# Altium PCB AC_REMOTE.PcbDoc
Units mil, origin at the board's own origin, x right, y up, seen from the top; angles counter-clockwise.
Board outline 1780 x 4730 mil, 2 copper layers (Top Layer, Bottom Layer); 44 components, 38 nets, 149 pads, 107 vias.
Unrouted connection lines stored in the file: 1.
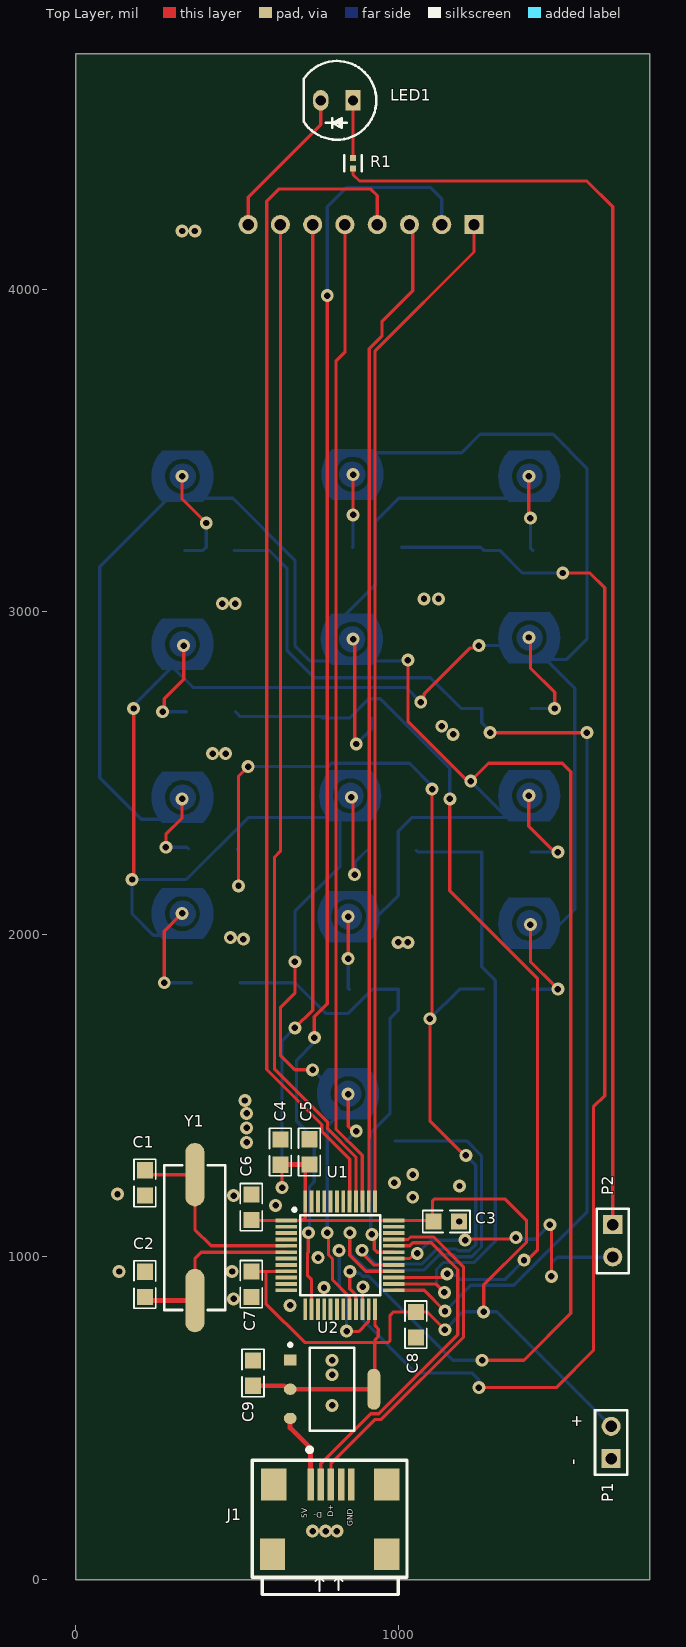
[diagram p0: Top Layer view]
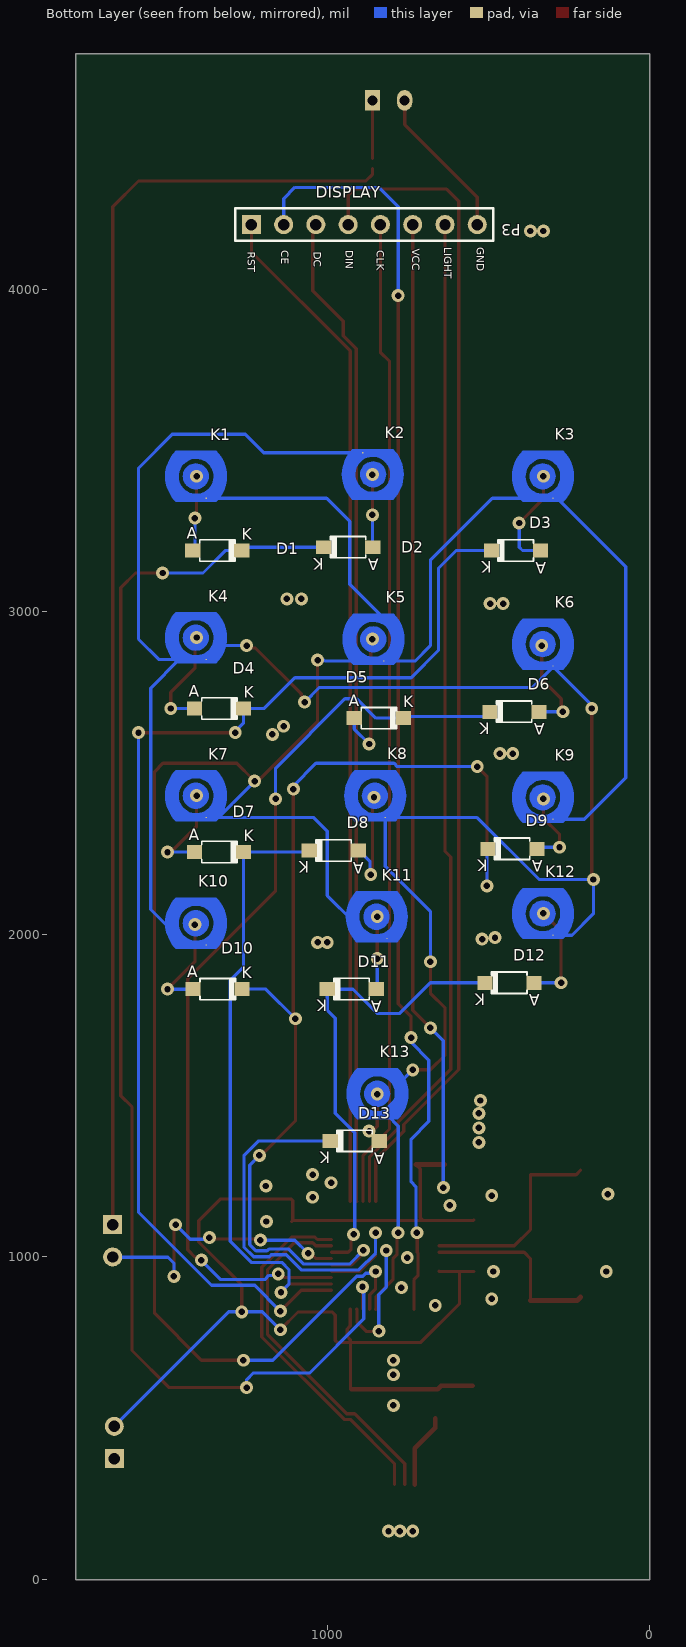
[diagram p1: Bottom Layer view, seen from below]
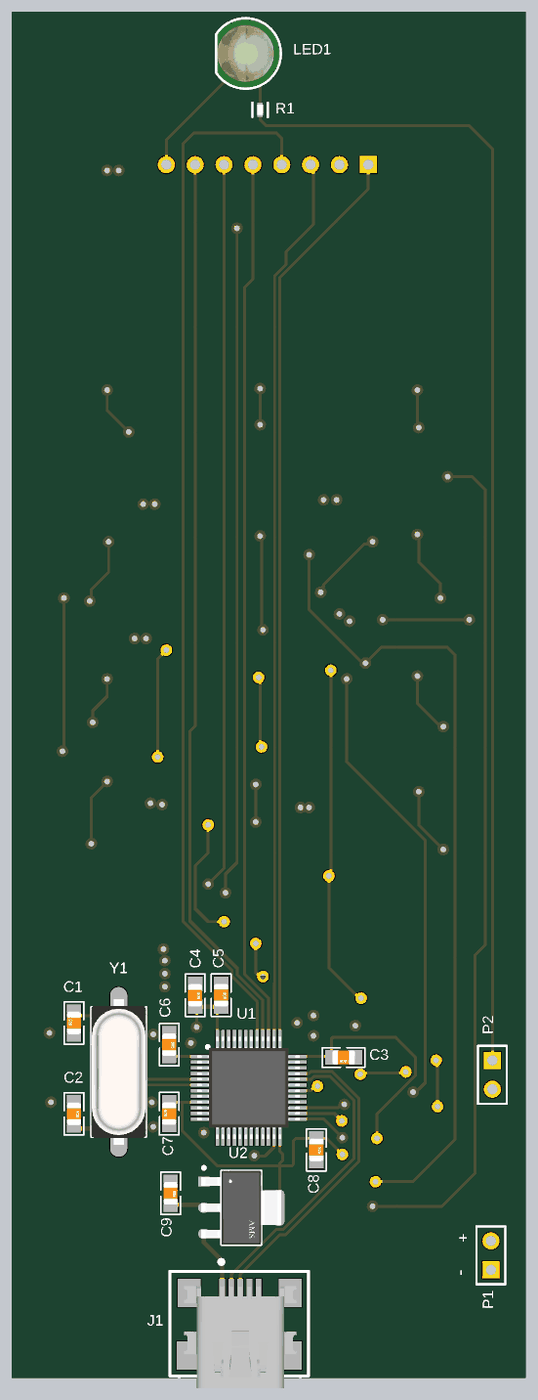
[diagram p2: 3D render of the assembled board from above, using the file's embedded part models]

## Layer stack, top to bottom
Top Solder: solder mask 0.4, Solder Resist, Dk 3.5
Top Layer: signal copper 1.4
Dielectric 1: dielectric 12.6, FR-4, Dk 4.8
Bottom Layer: signal copper 1.4
Bottom Solder: solder mask 0.4, Solder Resist, Dk 3.5

## Board outline
0,0 0,4730 1780,4730 1780,0

## Design rules (kind name [scope] priority, off if disabled: settings)
Clearance [All] p1: gap=8 ignorepadtopadclearanceinfootprint=TRUE
PolygonConnect [All] p1: connectstyle=Relief reliefconductorwidth=10 reliefentries=4 polygonreliefangle="90 Angle" airgapwidth=10
RoutingVias [All] p1: holewidth=20 width=30 viastyle="Through Hole" minholewidth=20 minwidth=30 maxholewidth=20 maxwidth=50
SolderMaskExpansion [All] p1: expansion=4 istentingtop=FALSE
Width [All] p1: maxlimit=50 minlimit=10 preferedwidth=10
30 further rules are at their usual default settings.

## Classes and differential pairs
component class AC_REMOTE: C1 C2 C3 C4 C5 C6 C7 C8 C9 J1 LED1 P1 P2 R1 U1 U2 Y1
component class key_pad: D1 D2 D3 D4 D5 D6 D7 D8 D9 D10 D11 D12 D13 K1 K2 K3 K4 K5 K6 K7 K8 K9 K10 K11 K12 K13

## Components (designator, comment, footprint, x,y, rotation, side; value= is the part's Value field where it differs from the comment)
C1 "20pF" CAP_0805 215,1229.37 r90 top
C2 "20pF" CAP_0805 215,915 r270 top
C3 "100nF" CAP_0805 1149.37,1110 r180 top
C4 "100nF" CAP_0805 635,1325 r270 top
C5 "100nF" CAP_0805 725,1325.63 r270 top
C6 "100nF" CAP_0805 545,1154.37 r270 top
C7 "100nF" CAP_0805 545,915.63 r90 top
C8 "4.7uF" CAP_0805 1055,790 r270 top
C9 "47uF" CAP_0805 550,640 r270 top
D1 "1N4148W-7-F" DIO_SOD-123 1340.72,3189.78 r180 bottom
D2 "1N4148W-7-F" DIO_SOD-123 935,3200 r0 bottom
D3 "1N4148W-7-F" DIO_SOD-123 415,3190 r0 bottom
D4 "1N4148W-7-F" DIO_SOD-123 1335,2700 r180 bottom
D5 "1N4148W-7-F" DIO_SOD-123 840,2670 r180 bottom
D6 "1N4148W-7-F" DIO_SOD-123 420,2690 r0 bottom
D7 "1N4148W-7-F" DIO_SOD-123 1335,2255 r180 bottom
D8 "1N4148W-7-F" DIO_SOD-123 980,2260 r0 bottom
D9 "1N4148W-7-F" DIO_SOD-123 426.28,2265.22 r0 bottom
D10 "1N4148W-7-F" DIO_SOD-123 1340,1830 r180 bottom
D11 "1N4148W-7-F" DIO_SOD-123 924.28,1830.22 r0 bottom
D12 "1N4148W-7-F" DIO_SOD-123 435,1850 r0 bottom
D13 "1N4148W-7-F" DIO_SOD-123 915,1360 r0 bottom
J1 "USB2.0 MINI B" CON_690-005-299-043 964.72,295 r90 top
K1 "KEY PAD" KEYPAD 1392,3383.5 r180 bottom
K2 "KEY PAD" KEYPAD 873,3461.5 r0 bottom
K3 "KEY PAD" KEYPAD 317,3383.5 r180 bottom
K4 "KEY PAD" KEYPAD 1392,2883.5 r180 bottom
K5 "KEY PAD" KEYPAD 842,2878.5 r180 bottom
K6 "KEY PAD" KEYPAD 317,2863.5 r180 bottom
K7 "KEY PAD" KEYPAD 1392,2393.5 r180 bottom
K8 "KEY PAD" KEYPAD 837,2393.5 r180 bottom
K9 "KEY PAD" KEYPAD 317,2388.5 r180 bottom
K10 "KEY PAD" KEYPAD 1392,1998.5 r180 bottom
K11 "KEY PAD" KEYPAD 832,2018.5 r180 bottom
K12 "KEY PAD" KEYPAD 317,2028.5 r180 bottom
K13 "KEY PAD" KEYPAD 830,1470 r180 bottom
LED1 "LED THD 5mm GREEN" LED_5MM_GREEN 810,4585 r180 top
P1 "Header 2" HDR1X2 1660,375 r90 top
P2 "Header 2" HDR1X2 1665,1100 r270 top
P3 "Header 8" HDR1X8 1235,4200 r180 bottom
R1 "CRCW0402100RFKED" FP-CRCW0402-e3-IPC_C 860,4390 r90 top
U1 "STM32F103C8T6" LQFP-48_19.6_393_58X11_SMD 820,1005 r0 top
U2 "AMS1117-3.3" FP-AMS1117-IPC_C 795,590 r0 top
Y1 "8MHz" "HC-49S SMD" 370,1060 r90 top

## Footprints (in the part's own frame and the unit in brackets; to place one, negate y for a bottom-side part, rotate by r counter-clockwise, add the part's x,y. Pads: shape width x height; smd on the part's side, far side on the other; paste and mask are expansions set on the pad)
CAP_0805 [mil] "Ceramic Capacitor"
  rect 50x50 smd mask+3: 1(-39.37,0) 2(39.37,0)
  silkscreen extent -73,-34 73,34, body extent -39,-25 39,25, height 31
CON_690-005-299-043 [mm] "USB MINI-B"
  rect 2.5x0.5 smd: 1(0,6) 2(0,5.2) 3(0,4.4) 4(0,3.6) 5(0,2.8)
  rect 2.5x2 smd: 6(-5.5,9) 6(-5.5,0) 6(0,8.9) 6(0,0)
  silkscreen extent -8.66,-1.6 2.88,10.6, body extent -8.4,-0.55 0.6,9.35, height 3.96
DIO_SOD-123 [mm] "DIODE GEN PURP"
  rect 1.2x1.1 smd mask+0.076: A(-1.937,0.006) K(1.923,0.006)
  silkscreen extent -1.38,-0.84 1.44,0.86, body extent -1.92,-0.84 1.92,0.86, height 1.43
FP-AMS1117-IPC_C [mm]
  rect 1.004x0.872 smd paste+0 mask+0: 1(-3.295,2.29)
  rrect100% 1.004x0.872 smd paste+0 mask+0: 2(-3.295,0) 3(-3.295,-2.29)
  rrect87% 1.004x3.182 smd paste+0 mask+0: 4(3.295,0)
  silkscreen extent -3.42,-3.25 1.75,3.62, body extent -3.9,-3.35 3.9,3.35, height 0.25
FP-CRCW0402-e3-IPC_C [mil]
  rect 18.43x18.6 smd paste+0 mask+0: 1(-15.83,0) 2(15.83,0)
  silkscreen extent -25,-27 25,27, body extent -29,-15 29,15, height 10
"HC-49S SMD" [mm] "SMD crystal resonator, ABL, ABLS, HC-49, HC49 11X4.5MM"
  oval 5x1.5 smd: 1(-4.953,0) 2(4.953,0)
  Top Layer pour cut-out: -5.715,1.524 5.715,1.524 5.715,-1.778 5.588,-1.651 -5.715,-1.651
  silkscreen extent -5.7,-2.4 5.7,2.4, body extent -6.4,-2.41 6.4,2.42, height 4.3
HDR1X2 [mm] "Connector; Header; 2 Position"
  rect 1.5x1.5 hole 0.9: 1(0,0)
  round 1.5 hole 0.9: 2(2.54,0)
  silkscreen extent -1.27,-1.27 3.81,1.27
HDR1X8 [mm] "Connector; Header; 8 Position"
  rect 1.5x1.5 hole 0.9: 1(0,0)
  round 1.5 hole 0.9: 2(2.54,0) 3(5.08,0) 4(7.62,0) 5(10.16,0) 6(12.7,0) 7(15.24,0) 8(17.78,0)
  silkscreen extent -1.27,-1.27 19.05,1.27
KEYPAD [mil]
  rect 3.94x3.94 smd paste-2.36 mask+0: 1(17,-31.5) 2(-18,31.5)
  Top Layer region: -77.3,-42.75 -106.13,7.17 -106.13,64.81 -77.31,114.73 -77.3,114.73 48.68,114.73 72.82,78.6 81.3,35.99 72.82,-6.63 48.68,-42.75 48.68,-42.75 -10.94,-42.75 -10.94,-18.43 15.7,-9.52 34.34,11.49 40.03,38.99 31.24,65.67 10.31,84.41 -17.17,90.23 -43.89,81.56 -62.72,60.72 -68.66,33.27 -60.12,6.51 -39.37,-12.42 -11.94,-18.49 -11.94,-18.49 -10.94,-18.43 -10.94,-42.75
  Top Layer region: -55.47,35.99 -52.41,20.62 -43.71,7.59 -30.68,-1.11 -15.31,-4.17 -15.31,-4.17 0.06,-1.11 13.08,7.59 21.79,20.62 24.84,35.99 24.84,35.99 21.79,51.36 13.08,64.39 0.06,73.09 -15.31,76.15 -15.31,76.15 -30.68,73.09 -43.71,64.39 -52.41,51.36 -55.47,35.99
LED_5MM_GREEN [mm] "LED THD 5MM GREEN"
  rect 1.2x1.6 hole 0.8: 1(-1.27,0)
  oval 1.2x1.6 hole 0.8: 2(1.27,0)
  silkscreen extent -3.1,-3.1 2.6,3.1, body extent -3,-3 2.5,3, height 9.14
LQFP-48_19.6_393_58X11_SMD [mm] "48LQFP"
  rect 1.7x0.3 smd mask+0.076: 1(-4.238,2.75) 2(-4.238,2.25) 3(-4.238,1.75) 4(-4.238,1.25) 5(-4.238,0.75) 6(-4.238,0.25) 7(-4.238,-0.25) 8(-4.238,-0.75) 9(-4.238,-1.25) 10(-4.238,-1.75) 11(-4.238,-2.25) 12(-4.238,-2.75) 25(4.238,-2.75) 26(4.238,-2.25) 27(4.238,-1.75) 28(4.238,-1.25) 29(4.238,-0.75) 30(4.238,-0.25) 31(4.238,0.25) 32(4.238,0.75) 33(4.238,1.25) 34(4.238,1.75) 35(4.238,2.25) 36(4.238,2.75)
  rect 0.3x1.7 smd mask+0.076: 13(-2.75,-4.238) 14(-2.25,-4.238) 15(-1.75,-4.238) 16(-1.25,-4.238) 17(-0.75,-4.238) 18(-0.25,-4.238) 19(0.25,-4.238) 20(0.75,-4.238) 21(1.25,-4.238) 22(1.75,-4.238) 23(2.25,-4.238) 24(2.75,-4.238) 37(2.75,4.238) 38(2.25,4.238) 39(1.75,4.238) 40(1.25,4.238) 41(0.75,4.238) 42(0.25,4.238) 43(-0.25,4.238) 44(-0.75,4.238) 45(-1.25,4.238) 46(-1.75,4.238) 47(-2.25,4.238) 48(-2.75,4.238)
  silkscreen extent -3.72,-3.15 3.15,3.72, body extent -4.5,-4.5 4.5,4.5, height 1.7

## Part data
C1 C2: library part CAP_20pF-50V-10%-0805, "±10% 50V Ceramic Capacitor C0G, NP0 0805 (2012 Metric)", Alternate Part Number-1=NA, Case/Package=0805, Manufacturer="AVX Corporation", Manufacturer Part Number=08055A200KAT2A, Supplier Part Number-1="478-11887-1-ND - Cut Tape (CT)", Supplier-1=Digikey
C3 C4 C5 C6 C7: library part CAP_100pF-50V-5%-0805, "100nF ±5% 50V Ceramic Capacitor C0G, NP0 0805 (2012 Metric)", Alternate Part Number-1=NA, Case/Package=0805, Manufacturer=KEMET, Manufacturer Part Number=CC0805JRNPO9BN101, Supplier Part Number-1=0805N101J500LT, Supplier-1=SIRICOM
C8: library part CAP_4.7uF-50V-10%-0805, "4.7µF ±10% 50V Ceramic Capacitor X5R 0805 (2012 Metric)", Alternate Part Number-1=NA, Case/Package=0805, Manufacturer=Yageo, Manufacturer Part Number=GRM21BR61H475KE51L, Supplier Part Number-1=CL21A475KBQNNNE, Supplier-1=SIRICOM
C9: library part CAP_47pF-50V-5%-0805, "47uF ±5% 50V Ceramic Capacitor C0G, NP0 0805 (2012 Metric)", Alternate Part Number-1=NA, Case/Package=0805, Manufacturer=KEMET, Manufacturer Part Number=C0805C470J5GACTU, Supplier Part Number-1=0805N450J500CT, Supplier-1=SIRICOM
D1 D2 D3 D4 D5 D6 D7 D8 D9 D10 D11 D12 D13: library part DIO_100V-300mA-SOD123, "Diode Standard 100V 300mA (DC) Surface Mount SOD-123", Alternate Part Number-1=NA, Case/Package=SOD123, Manufacturer=FAIRCHILD, Manufacturer Part Number=1N4148W-7-F, Supplier Part Number-1=1N4148W-7-F, Supplier-1=SIRICOM
J1: library part CON_USB2.0-MINIB-SMD, "USB - mini B USB 2.0 Receptacle Connector 5 Position Surface Mount, Right Angle", Alternate Part Number-1=NA, Case/Package=USB-MINI-B, Manufacturer=EDAC, Manufacturer Part Number=690-005-299-043, Supplier Part Number-1=C105424, Supplier-1=LCSC
P1 P2: "Header, 2-Pin", LatestRevisionDate=17-Jul-2002, LatestRevisionNote="Re-released for DXP Platform.", Publisher="Altium Limited"
P3: "Header, 8-Pin", LatestRevisionDate=17-Jul-2002, LatestRevisionNote="Re-released for DXP Platform.", Publisher="Altium Limited"
R1: library part CMP-1011-00397-3, "RES Thick Film, 100Ω, 1%, 0.063W, 100ppm/°C, 0402", Case Code (Imperial)=0402, Case Code (Metric)=1005, Max Operating Temperature=155°C, Max Power Dissipation=63mW, Min Operating Temperature=-55°C, Package Quantity=10, Resistance=100R, Temperature Coefficient=100ppm/°C, Tolerance=1%, Voltage Rating=50V, Case/Package=0402, Composition="Thick Film", Contact Plating=Tin, Depth=0.5mm, Features="Automotive AEC-Q200", Height=0.35mm, Lead Free="Lead Free", Length=1mm, Military Standard=Not, Mount="Surface Mount", Number of Terminations=2, Packaging="Tape and Reel", Power Rating=63mW, Radiation Hardening=No, Termination=SMD/SMT, Voltage Rating (DC)=50V, Weight=2.3E-05oz, Width=0.02inch, Working Voltage=50V
U1: library part IC_STM32F103C8T6, "ARM® Cortex®-M3 STM32F1 Microcontroller IC 32-Bit 72MHz 64KB (64K x 8) FLASH 48-LQFP (7x7)", Alternate Part Number-1=NA, Case/Package=LQFP48, Manufacturer=STMicroelectronics, Manufacturer Part Number=STM32F103C8T6, Supplier Part Number-1=STM32F103C8T6, Supplier-1=LCSC
U2: library part CMP-209535-000001-1, "LDO Voltage Regulators 1A, 3.3V", Dropout Voltage=1.1V, Manufacturer="Advanced Monolithic Systems", Max Junction Temp=+125°C, Max Power Dissipation=1.2W, Max Supply Voltage=15V, Nominal Supply Current=5mA, Output Current=1A, Output Voltage=3.3V, Package=AMS1117, Temperature="-40°C to +125°C", Temperature Range Low=-40°C, Automotive=No, Category=IC, ComponentLink2Description=Datasheet, ComponentLink2URL=http://www.advanced-monolithic.com/pdf/ds1117.pdf, Device Class L1="Integrated Circuits (ICs)", Device Class L2="Power Management ICs", Device Class L3="Voltage Regulators - Linear", Height=1.8mm, Ipc Land Pattern Name=SOT229P700X180-4, Lead Free=Yes, Manufacturer Part Number=AMS1117-3.3, Number Of Outputs=1, Octopart=https://octopart.com/ams1117-3.3-advanced+monolithic+systems-25899300, Output Type=Fixed, RoHS=TRUE, Standoff Height=0.64mm, Temperature Range High=+125°C
Y1: library part "Crystal HC-49S SMD 8MHz", "SMT Crystal", PartNumber=ABLS-8.000MHZ-K4T

## Via types
v1: diameter 40, hole 20, Top Layer to Bottom Layer, 65 vias
v2: diameter 40, hole 20, Top Layer to Bottom Layer, tented both sides, 42 vias

## Nets (pads, with @x,y where several pads share a name; then routed paths per layer and width w, separated by ;. In a path a pad name is that pad's centre, name@x,y a point inside that pad or via, vN(x,y) a via of type N, cw(c..) or ccw(c..) an arc to the next point about the centre after c; other vN are vias at no path point)
+5: J1.1 U2.3 | length 231.3
  Top Layer w15: U2.3 665,499.57 665,470 728.5,406.5 J1.1
CE: P3.2 U1.14 | length 3967.2
  Top Layer w10: v2(722,1075) 721,1074 721,1013.82 719.02,1011.84 719.02,941.24 731.42,928.84 U1.14 ; v2(740,1680) 740,1744.54 780,1784.54 v2(780,3980)
  Bottom Layer w10: v2(722,1075) 725,1078 725,1218.02 740,1233.02 740,1365.21 685,1420.21 685,1610 740,1665 v2(740,1680) ; v2(780,3980) 780,4255 840,4315 1100,4315 1135,4280 P3.2
CLK: P3.5 U1.39 | length 3073.7
  Top Layer w10: P3.5 835,3804.49 807,3776.49 807,1396.53 888.9,1314.63 U1.39
col_1: K1.1 K3.1 K5.1 K7.1 K9.1 K11.1 U1.21 | length 7730.9
  Top Layer w10: v1(850,955) 850,901.2 866.75,884.45 868.43,882.77 868.43,838.93 U1.21 ; v2(1030,2850) 1030,2660 1215,2475 v2(1225,2475) 1225,2480 1230,2480 1280,2530 1509.14,2530 1535,2504.14 1535,825 1390,680 v1(1260,680)
  Bottom Layer w10: 295,3360 75,3140 75,2485 203,2357 K9.1 ; K3.1 488,3352 680,3160 680,2895 728,2847 K5.1 1007,2847 1010,2850 v2(1030,2850) ; 775,2905 775,2930 930,3085 930,3280 1002,3352 K1.1 ; K11.1 815,1983.48 878.48,1983.48 920,2025 920,2040 1000,2120 1000,2320 1042,2362 1338,2362 ; v1(850,955) 855.74,949.26 880.28,949.26 889.28,940.26 908.82,940.26 1169.09,680 v1(1260,680) ; v2(1225,2475) 1338,2362 ; K7.1 1338,2362
col_2: K2.1 K4.1 K6.1 K8.1 K10.1 K12.1 K13.1 U1.20 | length 7172.1
  Top Layer w10: v2(175,2170) 180,2175 v2(180,2700) ; v1(680,1915) 680,1817.99 635,1772.99 635,1625 680,1580 v1(735,1580) ; v1(780,1075) 784,1071 784,1006.33 796.39,993.94 796.39,929.36 848.75,877 848.75,838.93 U1.20 ; v2(1070,2720) 1070,2730.82 1080.78,2741.61 1080.78,2745.78 1222.35,2887.35 1242.35,2887.35 v2(1250,2895)
  Bottom Layer w10: v2(180,2700) 180,2710 300,2830 ; 290,2835 295,2835 300,2830 ; K12.1 241.27,1997 175,2063.27 v2(175,2170) 343.34,2170 535.34,2362 K8.1 820,2211.21 680,2071.21 v1(680,1915) ; K6.1 300,2830 ; v1(735,1580) 780.44,1534.56 780.44,1495.69 813,1463.13 K13.1 780,1405.5 v1(780,1075) ; K2.1 1196.5,3493 1253.5,3550 1480,3550 1585,3445 1585,2915 1522,2852 1458,2852 ; v2(1070,2720) 1025,2765 365,2765 300,2830 ; v2(1250,2895) 1325,2895 ; K10.1 1444.14,1967 1450,1972.86 1450,1980 1547,2077 1547,2763 1458,2852 ; K4.1 1458,2852
DC: P3.3 U1.38 | length 3088.8
  Top Layer w10: U1.38 909.36,1172.63 909.36,1368.35 910.27,1369.26 910.27,3815.72 950,3855.46 950,3900 1045,3995 1045,4169.61 1044.39,4170.23 1044.39,4190.61 P3.3
DIN: P3.4 U1.41 | length 3663.5
  Top Layer w10: U1.41 849.53,1303.09 763,1389.62 763,1410.63 592.47,1581.16 592.47,4272.47 630,4310 915,4310 935,4290 P3.4
GND: C1.1 C2.1 C3.1 C4.1 C5.1 C6.1 C7.1 C8.2 C9.1 J1.5 LED1.2 P1.1 P3.8 U1.8 U1.23 U1.35 U1.47 U2.1 | length 857.8
  Top Layer w10: P3.8 535,4285 760,4510 LED1.2 ; v1(840,770) 841.17,768.83 877.33,768.83 907.8,799.3 907.8,837.37 U1.23
  Bottom Layer w10: v1(817,1020) 817,906.5 840,883.5 v1(840,770)
  other v1: 735,150 775,150 810,150 795,540 795,635 795,680 665,850 490,870 770,905 135,955 485,955 752.02,998.18 1188.74,1110 620,1160 1045,1185 490,1190 130,1195 1190,1220 988,1230 1045,1255 530,1355 530,1400 530,1445 525,1485 1000,1975 1030,1975 520,1985 480,1990 425,2560 465,2560 1170,2620 1135,2645 455,3025 495,3025 1080,3040 1125,3040 330,4180 370,4180
LIGHT: P3.7 U1.40 | length 3140.1
  Top Layer w10: P3.7 635,2257.61 617,2239.61 617,1582.09 781,1418.09 781,1397.07 869.21,1308.86 U1.40
NetD1_A: D1.A K1.2 | length 242
  Top Layer w10: v2(1405,3420) 1405,3295 v2(1410,3290)
  Bottom Layer w10: v2(1405,3420) K1.2 ; v2(1410,3290) 1410,3197 D1.A
NetD2_A: D2.A K2.2 | length 232.8
  Top Layer w10: v2(860,3300) v2(860,3425)
  Bottom Layer w10: K2.2 v2(860,3425) ; D2.A 860,3201.06 v2(860,3300)
NetD3_A: D3.A K3.2 | length 328.6
  Top Layer w10: v2(330,3420) 330,3350 v2(405,3275)
  Bottom Layer w10: v2(330,3420) K3.2 ; D3.A 394.78,3189.78 405,3200 v2(405,3275)
NetD4_A: D4.A K4.2 | length 327
  Top Layer w10: v2(1405,2920) 1410,2915 1410,2825 1485,2750 v2(1485,2700)
  Bottom Layer w10: D4.A 1464.78,2700.22 1465,2700 v2(1485,2700)
NetD5_A: D5.A K5.2 | length 433.5
  Top Layer w10: v2(860,2915) 865,2910 865,2595 v2(870,2590)
  Bottom Layer w10: K5.2 v2(860,2915) ; v2(870,2590) 916.28,2636.28 D5.A
NetD6_A: D6.A K6.2 | length 306.2
  Top Layer w10: v2(269.78,2689.78) 274.78,2694.78 274.78,2729.78 335,2790 v2(335,2895)
  Bottom Layer w10: v2(269.78,2689.78) D6.A
NetD7_A: D7.A K7.2 | length 309
  Top Layer w10: v2(1405,2430) 1405,2335 1485,2255 v2(1495,2255)
  Bottom Layer w10: v2(1405,2430) K7.2 ; D7.A 1411.49,2255 v2(1495,2255)
NetD8_A: D8.A K8.2 | length 336.1
  Top Layer w10: v1(855,2425) 860,2420 860,2190 v1(865,2185)
  Bottom Layer w10: v1(865,2185) 866.98,2186.98 866.98,2225 901.76,2259.78 D8.A
NetD9_A: D9.A K9.2 | length 247.8
  Top Layer w10: v2(280,2270) 280,2310 330,2360 v2(330,2420)
  Bottom Layer w10: v2(280,2270) 345,2270 D9.A ; v2(330,2420) K9.2
NetD10_A: D10.A K10.2 | length 319.9
  Top Layer w10: v2(1410,2030) 1410,1915 1485,1840 1495,1840 v2(1495,1830)
  Bottom Layer w10: D10.A 1416.49,1830 v2(1495,1830)
NetD11_A: D11.A K11.2 | length 233.3
  Top Layer w10: v2(845,1925) v2(845,2055)
  Bottom Layer w10: v2(845,1925) 845,1833 D11.A ; v2(845,2055) K11.2
NetD12_A: D12.A K12.2 | length 328.7
  Top Layer w10: v2(275,1850) 275,2010 v2(330,2065)
  Bottom Layer w10: v2(275,1850) 358.51,1850 D12.A ; v2(330,2065) K12.2
NetD13_A: D13.A K13.2 | length 179.3
  Top Layer w10: v1(845,1504.5) 845,1405 860,1390 v1(870,1390)
  Bottom Layer w10: D13.A 840.69,1359.78 870,1389.09 v1(870,1390) ; v1(845,1504.5) K13.2
NetLED1_1: LED1.1 R1.2 | length 186.2
  Top Layer w10: R1.2 860,4580 865,4585 LED1.1
NetP2_1: P2.1 R1.1 | length 4020.6
  Top Layer w10: R1.1 860,4355 880,4335 1585,4335 1665,4255 P2.1
NetP2_2: P2.2 U1.30 | length 931.3
  Top Layer w10: U1.30 1035.37,995.16 1051.05,1010.83 v1(1059.17,1010.83) ; v1(1207.2,1052) 1211.2,1056 1361,1056 v1(1365,1060) ; v1(1470,1100) 1475,1095 v1(1475,940)
  Bottom Layer w10: v1(1059.17,1010.83) 1100.33,1052 v1(1207.2,1052) ; v1(1365,1060) 1370,1055 1425,1055 v1(1470,1100) ; v1(1475,940) 1475,980.4 1493.45,998.85 1663.85,998.85 P2.2
OSC_IN: C1.2 U1.5 Y1.2 | length 634.7
  Top Layer w10: C1.2 228.74,1255 Y1.2 370,1085 420.47,1034.53 U1.5
OSC_OUT: C2.2 U1.6 Y1.1 | length 580.8
  Top Layer w10: Y1.1 370,995 389.84,1014.84 U1.6
  Top Layer w15: C2.2 225.63,865 Y1.1
R_1: D1.K D2.K U1.22 | length 4099.5
  Top Layer w10: U1.22 889.68,838.93 889.68,906.33 v2(890.61,907.26) ; v2(1250,595) 1490,595 1605,710 1605,1465 1640,1500 1640,3074.14 1594.14,3120 v2(1510,3120)
  Bottom Layer w10: v2(890.61,907.26) 886.44,903.09 886.44,808.56 1055,640 1230,640 1250,620 v2(1250,595) ; D2.K 1255.22,3199.78 D1.K 1315,3190 1385,3120 v2(1510,3120)
R_2: D3.K D4.K U1.25 | length 3744.9
  Top Layer w10: U1.25 1080.61,896.73 v2(1145.08,832.26) ; v2(1285,2625) v2(1585,2625)
  Bottom Layer w10: D3.K 600.22,3189.78 655,3135 655,2880 740,2795 1100,2795 1194.78,2700.22 D4.K 1259.28,2655.84 1285,2630.12 v2(1285,2625) ; v2(1145.08,832.26) 1224.82,912 1358.67,912 1585,1138.33 v2(1585,2625)
R_3: D5.K D6.K U1.27 | length 2899.2
  Top Layer w10: U1.27 1132.18,936.1 1143.67,947.59 v2(1151.79,947.59) ; v2(1160,2420) 1160,2135 1432,1863 1432,1022 1409.75,999.75 1407.87,999.75 1398.12,990 v2(1390,990)
  Bottom Layer w10: D6.K 510.51,2675 D5.K@778.28,2675 ; D5.K 849.06,2670.22 908.84,2730 945,2730 1160,2515 v2(1160,2420) ; v2(1151.79,947.59) 1156.5,942.88 1180.68,942.88 1193.55,930 1330,930 v2(1390,990)
R_4: D7.K D8.K U1.26 | length 1896.2
  Top Layer w10: U1.26 1117.01,916.42 v1(1143.2,890.23)
  Bottom Layer w10: D8.K 1060.29,2255.22 D7.K 1259.28,1898.88 1300.9,1857.26 1300.9,1048.12 1235.78,983 1140.53,983 1118.79,961.26 1118.79,915.31 1143.2,890.9 v1(1143.2,890.23)
R_5: D9.K D10.K U1.29 | length 3319.6
  Top Layer w10: v1(505,2150) 505,2490 v1(535,2520) ; v1(888,1020.74) 888,1012 924.53,975.47 U1.29 ; v1(1105,2450) 1105,1750.41 1098.38,1743.8 v1(1098.38,1738.38) 1098.38,1421.62 1205,1315 v1(1210,1315)
  Bottom Layer w10: D9.K@502,2262 D9.K 505,2265 v1(505,2150) ; v1(535,2520) 782.71,2520 792.71,2530 1035,2530 1105.86,2459.14 1105.86,2450.86 v1(1105,2450) ; v1(888,1020.74) 930.91,977.83 1072.83,977.83 1119.53,1024.53 1180.83,1024.53 1186.36,1019 1220.86,1019 1240.2,1038.33 1240.2,1284.8 v1(1210,1315) ; v1(1098.38,1738.38) 1190.22,1830.22 D10.K
R_6: D11.K D12.K U1.31 | length 1470
  Top Layer w10: v1(918.21,1070.25) 925.86,1062.6 925.86,1024.14 935.16,1014.84 U1.31
  Bottom Layer w10: D12.K 680.22,1849.78 775,1755 845,1755 920,1830 D11.K 1000,1765 975,1740 975,1445 915,1385 915,1073.46 v1(918.21,1070.25)
R_7: D13.K U1.28 | length 1323.3
  Top Layer w10: v1(850,1075) 850,1005 899.21,955.79 U1.28
  Bottom Layer w10: v1(850,1075) 850,1012.07 902.24,959.83 1080.29,959.83 1126.98,1006.53 1173.38,1006.53 1178.91,1001 1228.32,1001 1258.2,1030.88 1258.2,1313.47 1211.89,1359.78 D13.K
RST: P3.1 U1.37 | length 3155.2
  Top Layer w10: U1.37 928.27,3808.27 1235,4115 P3.1
USB_DN: J1.2 U1.32 | length 1092.7
  Top Layer w10: J1.2 760,359.21 915.15,514.36 939.8,514.36 1184.79,759.34 1184.79,961.26 1102.21,1043.83 1045.5,1043.83 1036.19,1034.53 U1.32
USB_DP: J1.3 U1.33 | length 1112.6
  Top Layer w10: J1.3 791.5,359.21 928.64,496.36 947.26,496.36 1202.79,751.89 1202.79,968.72 1109.67,1061.83 1038.04,1061.83 1030.42,1054.21 U1.33
VCC: C3.2 C4.2 C5.2 C6.2 C7.2 C8.1 C9.2 P1.2 P3.6 U1.1 U1.9 U1.24 U1.36 U1.48 U2.2 U2.4 | length 6898.8
  Top Layer w10: C7.2 590,955 ; C6.2 546.73,1113.27 U1.1 703.27,1113.27 ; C4.2 640,1280.63 v2(640,1215) ; U1.9 652.37,955.01 614.3,955.01 590,955 ; v2(680,1710) 735,1765 P3.6 ; C5.2 711.73,1272.99 U1.48 711.73,1121.73 703.27,1113.27 ; U2.4 927.49,592.76 927.49,735 ; 928.27,735 928.27,743.67 938,753.4 938,776.68 928.27,786.41 U1.24 ; C3.2 C3.2@1106.73,1113.27 ; v1(1145,774.26) 1145,775 1090.63,829.37 984.37,829.37 975,820 975,740.86 969.14,735 927.49,735 ; v1(1265,830) 1265,913.33 1398,1046.33 1398,1112 1330,1180 1112.59,1180 1106.73,1174.14 C3.2@1106.73,1113.27 ; 590,955 590,855 710,735 927.49,735 ; 703.27,1113.27 U1.36 C3.2@1106.73,1113.27
  Top Layer w15: C9.2 646.82,600.63 657.44,590 U2.2 U2.4 ; C4.2@635.64,1286.26 C5.2
  Bottom Layer w10: v2(640,1215) 640,1670 v2(680,1710) ; v1(1145,774.26) 1200.74,830 1305,830 P1.2
pads on no net: J1.4 J1.6 U1.2 U1.3 U1.4 U1.7 U1.10 U1.11 U1.12 U1.13 U1.15 U1.16 U1.17 U1.18 U1.19 U1.34 U1.42 U1.43 U1.44 U1.45 U1.46

## Silkscreen, mask and mechanical layers (free items; w line width, h text height)
Top Overlay:
  text "+" at 1581.22,470 h60 r90
  text "-" at 1573.48,355 h70 r90
  text "D-" at 765,215 h30 r180
  text "D+" at 805,195 h30 r90
  text "5V" at 724.67,190 h30 r90
  text "GND" at 864.67,165 h30 r90
Bottom Overlay:
  text "DISPLAY" at 1035,4270.67 h60
  text "GND" at 544.56,4130 h40 r90
  text "LIGHT" at 644.56,4130 h40 r90
  text "VCC" at 744.56,4124.96 h40 r90
  text "CLK" at 854.56,4120 h40 r90
  text "DIN" at 950,4120 h40 r90
  text "CE" at 1149.56,4120 h40 r90
  text "DC" at 1049.56,4115 h40 r90
  text "RST" at 1254.56,4115 h40 r90
Mechanical 1:
  lines w47.24: -23.62,0 ccw(c0,0) 0,-23.62 ; -23.62,0 ccw(c0,0) 0,-23.62 ; -23.62,0 -23.62,4730 ; -23.62,4730 cw(c0,4730) 0,4753.62 ; -23.62,4730 cw(c0,4730) 0,4753.62 ; 0,-23.62 1780,-23.62 ; 0,4753.62 1780,4753.62 ; 1780,-23.62 ccw(c1780,0) 1803.62,0 ; 1780,-23.62 ccw(c1780,0) 1803.62,0 ; 1780,4753.62 cw(c1780,4730) 1803.62,4730 ; 1780,4753.62 cw(c1780,4730) 1803.62,4730 ; 1803.62,0 1803.62,4730 ; 0,0 1780,0 1780,4730 0,4730 0,0 ; 23.62,23.62 23.62,4706.38 1756.38,4706.38 1756.38,23.62 23.62,23.62
Mechanical 13:
  the board outline again, w11.81

## Text inside footprints (layer, text, board x,y; h text height)
D1: Bottom Overlay "A" at 1434.73,3226.11 h35; Bottom Overlay "K" at 1264.94,3223.46 h35
D2: Bottom Overlay "A" at 841,3163.67 h35 r180; Bottom Overlay "K" at 1010.79,3166.32 h35 r180
D3: Bottom Overlay "A" at 321,3153.67 h35 r180; Bottom Overlay "K" at 490.79,3156.32 h35 r180
D4: Bottom Overlay "A" at 1429,2736.33 h35; Bottom Overlay "K" at 1259.21,2733.68 h35
D5: Bottom Overlay "A" at 934,2706.33 h35; Bottom Overlay "K" at 764.21,2703.68 h35
D6: Bottom Overlay "A" at 326,2653.67 h35 r180; Bottom Overlay "K" at 495.79,2656.32 h35 r180
D7: Bottom Overlay "A" at 1429,2291.33 h35; Bottom Overlay "K" at 1259.21,2288.68 h35
D8: Bottom Overlay "A" at 886,2223.67 h35 r180; Bottom Overlay "K" at 1055.79,2226.32 h35 r180
D9: Bottom Overlay "A" at 332.27,2228.89 h35 r180; Bottom Overlay "K" at 502.06,2231.54 h35 r180
D10: Bottom Overlay "A" at 1434,1866.33 h35; Bottom Overlay "K" at 1264.21,1863.68 h35
D11: Bottom Overlay "A" at 830.27,1793.89 h35 r180; Bottom Overlay "K" at 1000.06,1796.54 h35 r180
D12: Bottom Overlay "A" at 341,1813.67 h35 r180; Bottom Overlay "K" at 510.79,1816.32 h35 r180
D13: Bottom Overlay "A" at 821,1323.67 h35 r180; Bottom Overlay "K" at 990.79,1326.32 h35 r180